# Altium PCB PCB_INTER.PcbDoc
Units mm, origin at the board's own origin, x right, y up, seen from the top; angles counter-clockwise.
Board outline 48 x 54.6 mm, 2 copper layers (Top Layer, Bottom Layer); 33 components, 36 nets, 155 pads, 7 vias.
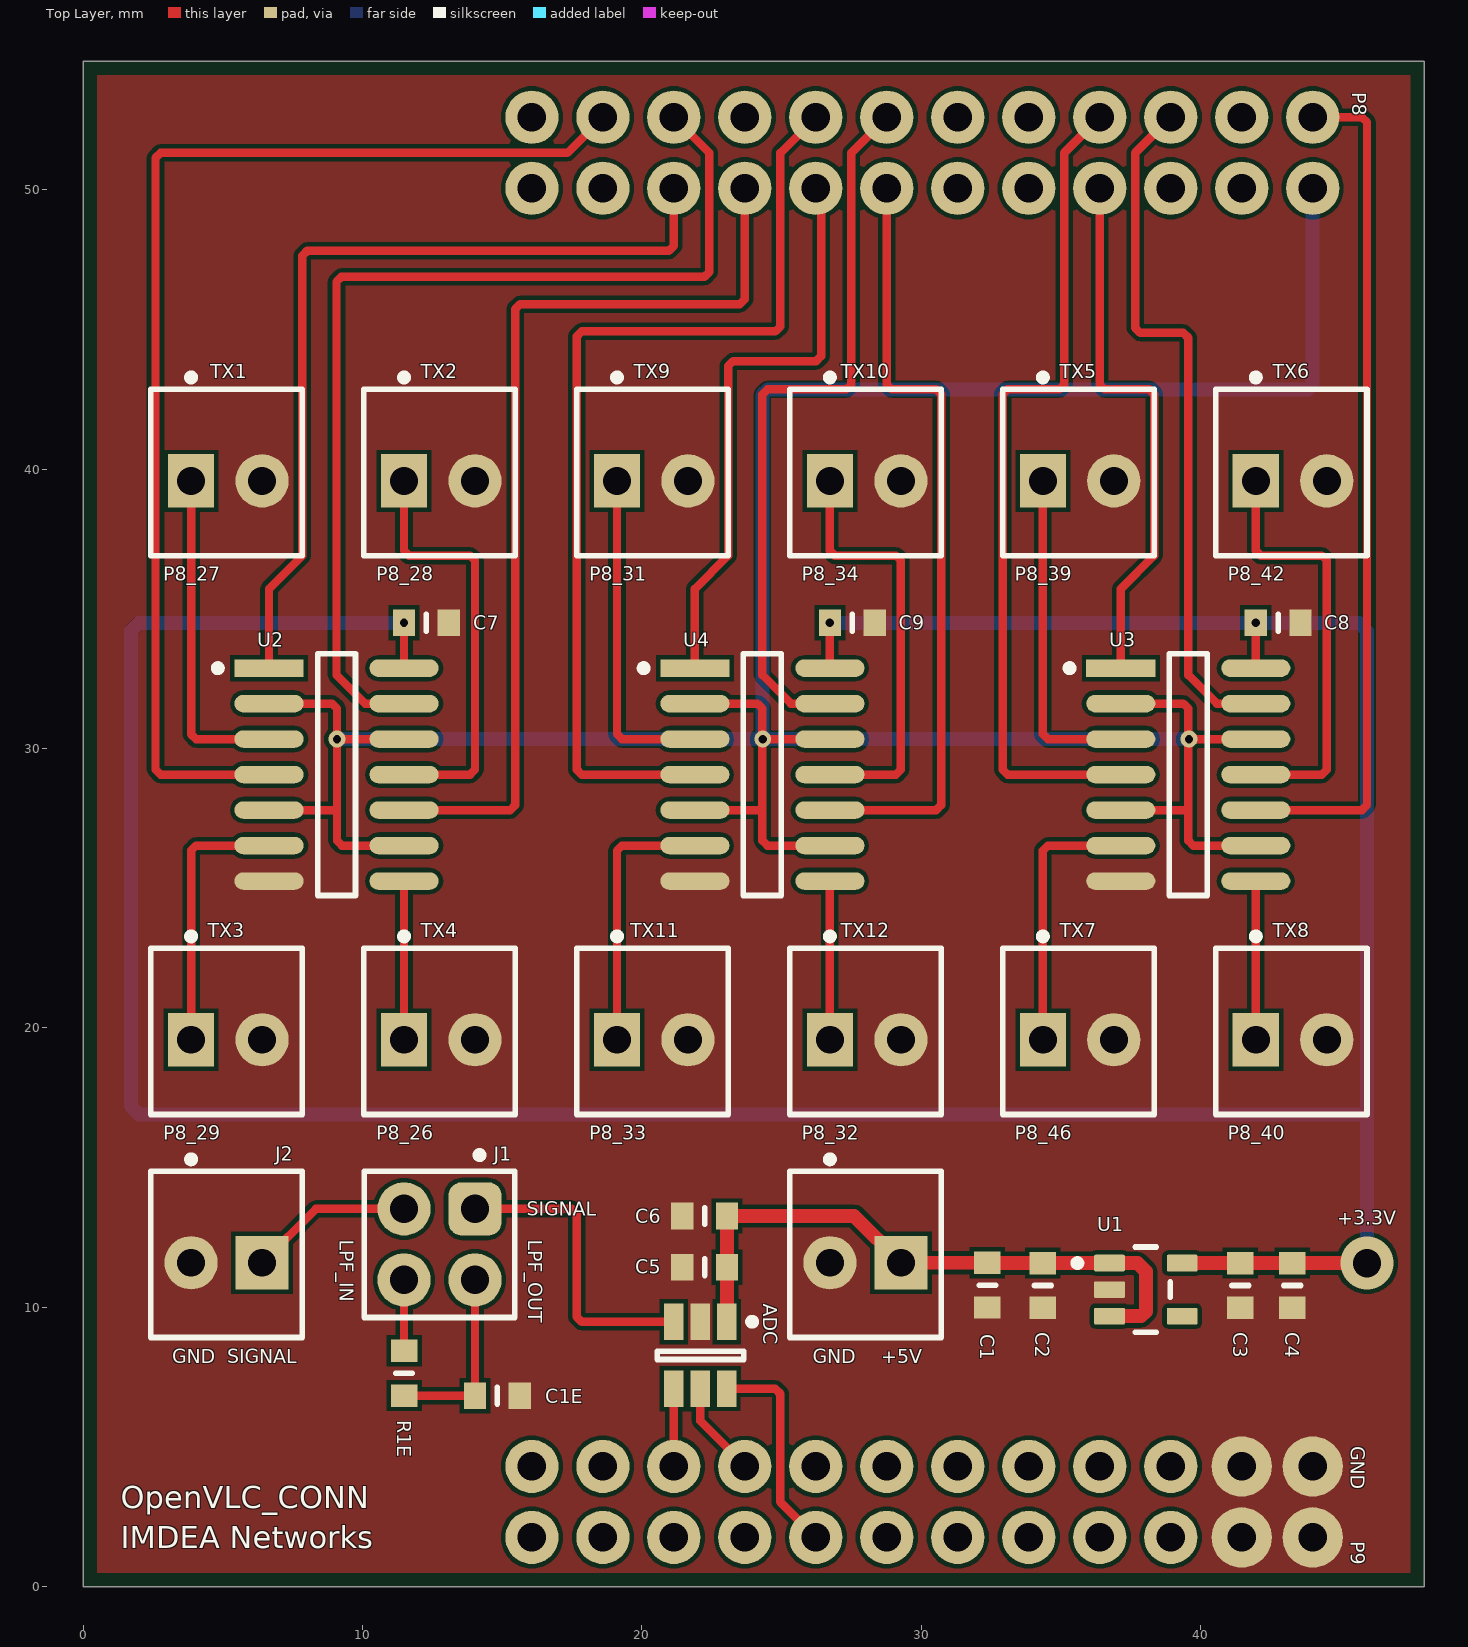
[diagram p0: Top Layer view]
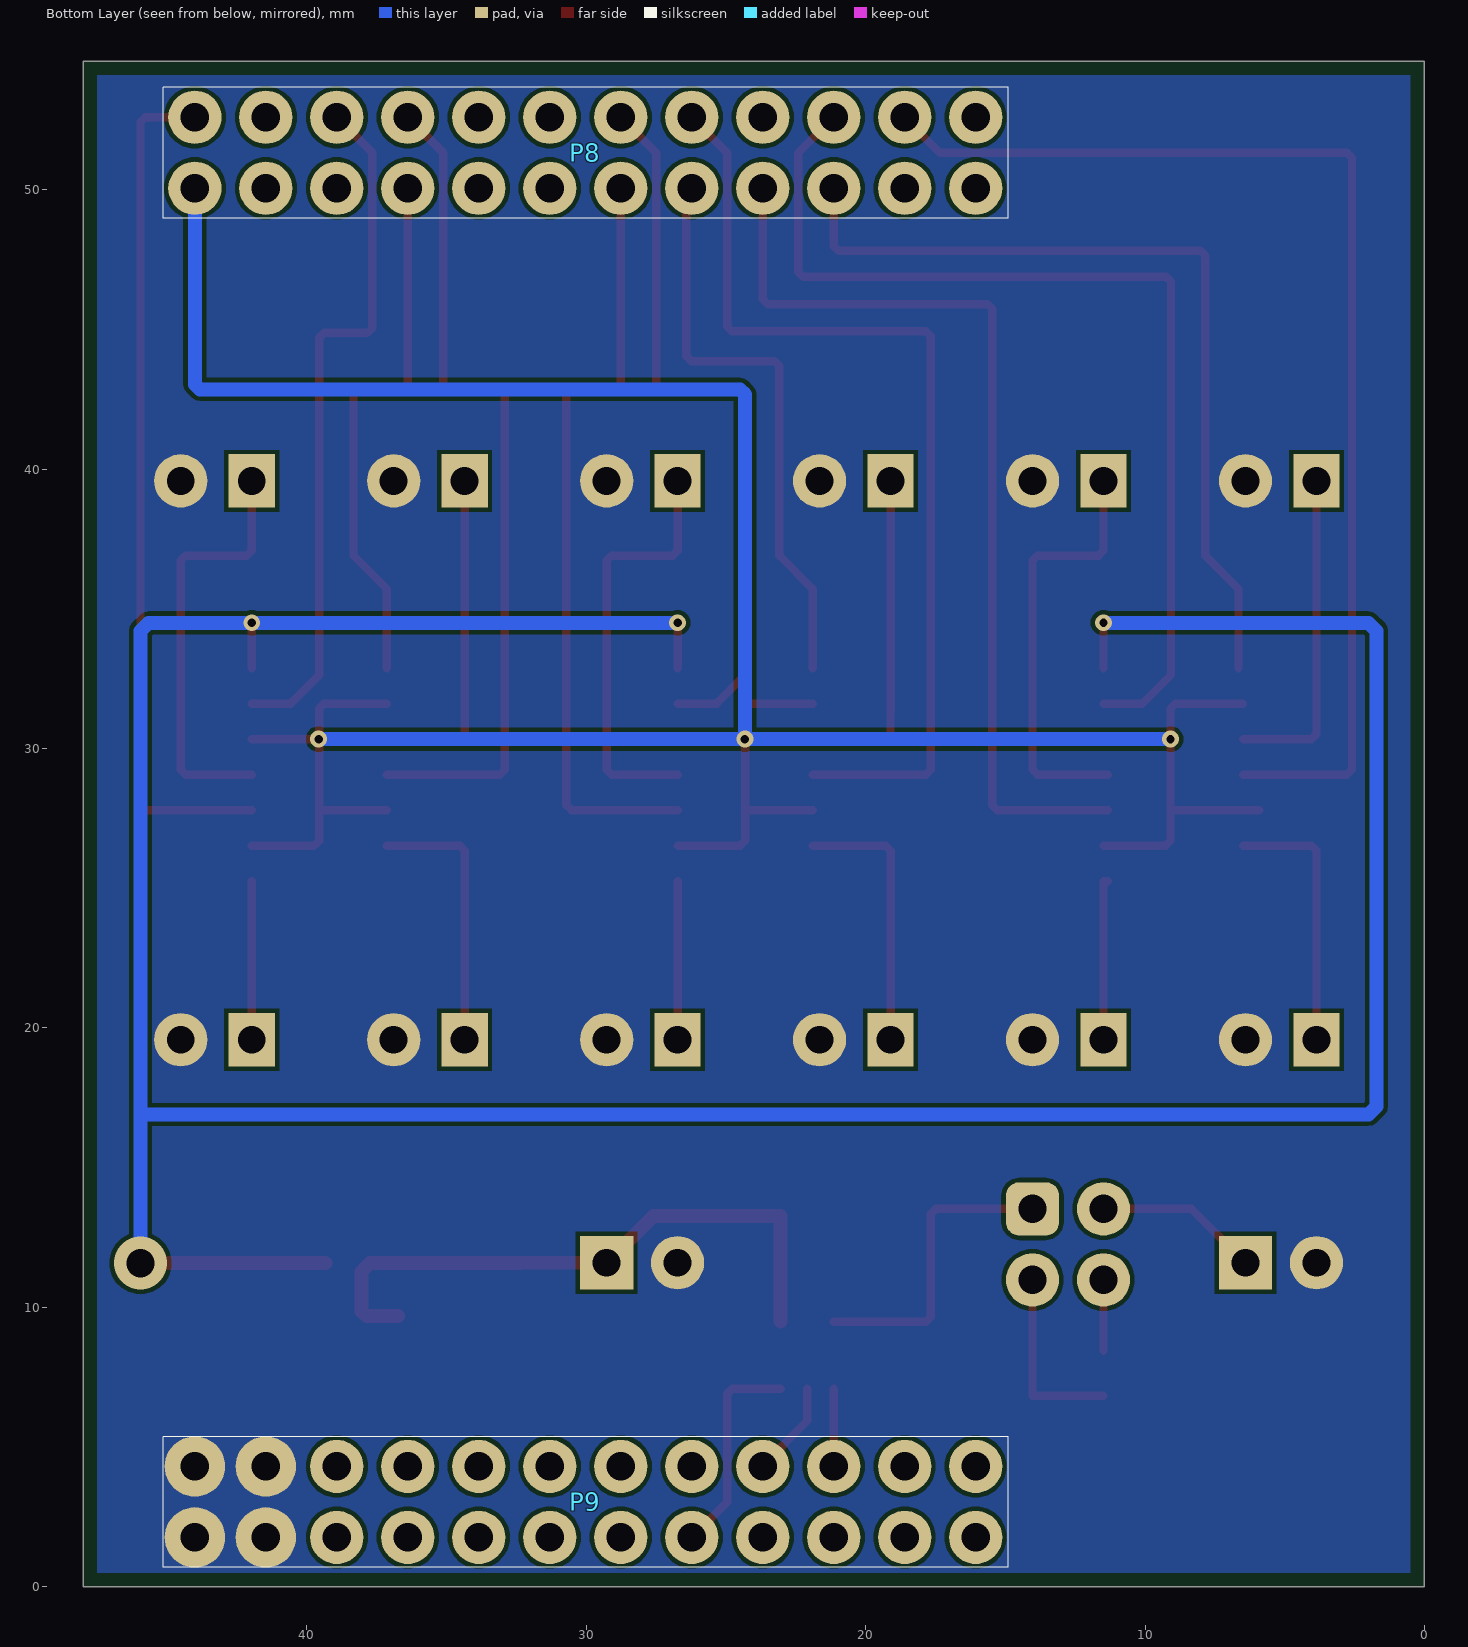
[diagram p1: Bottom Layer view, seen from below]
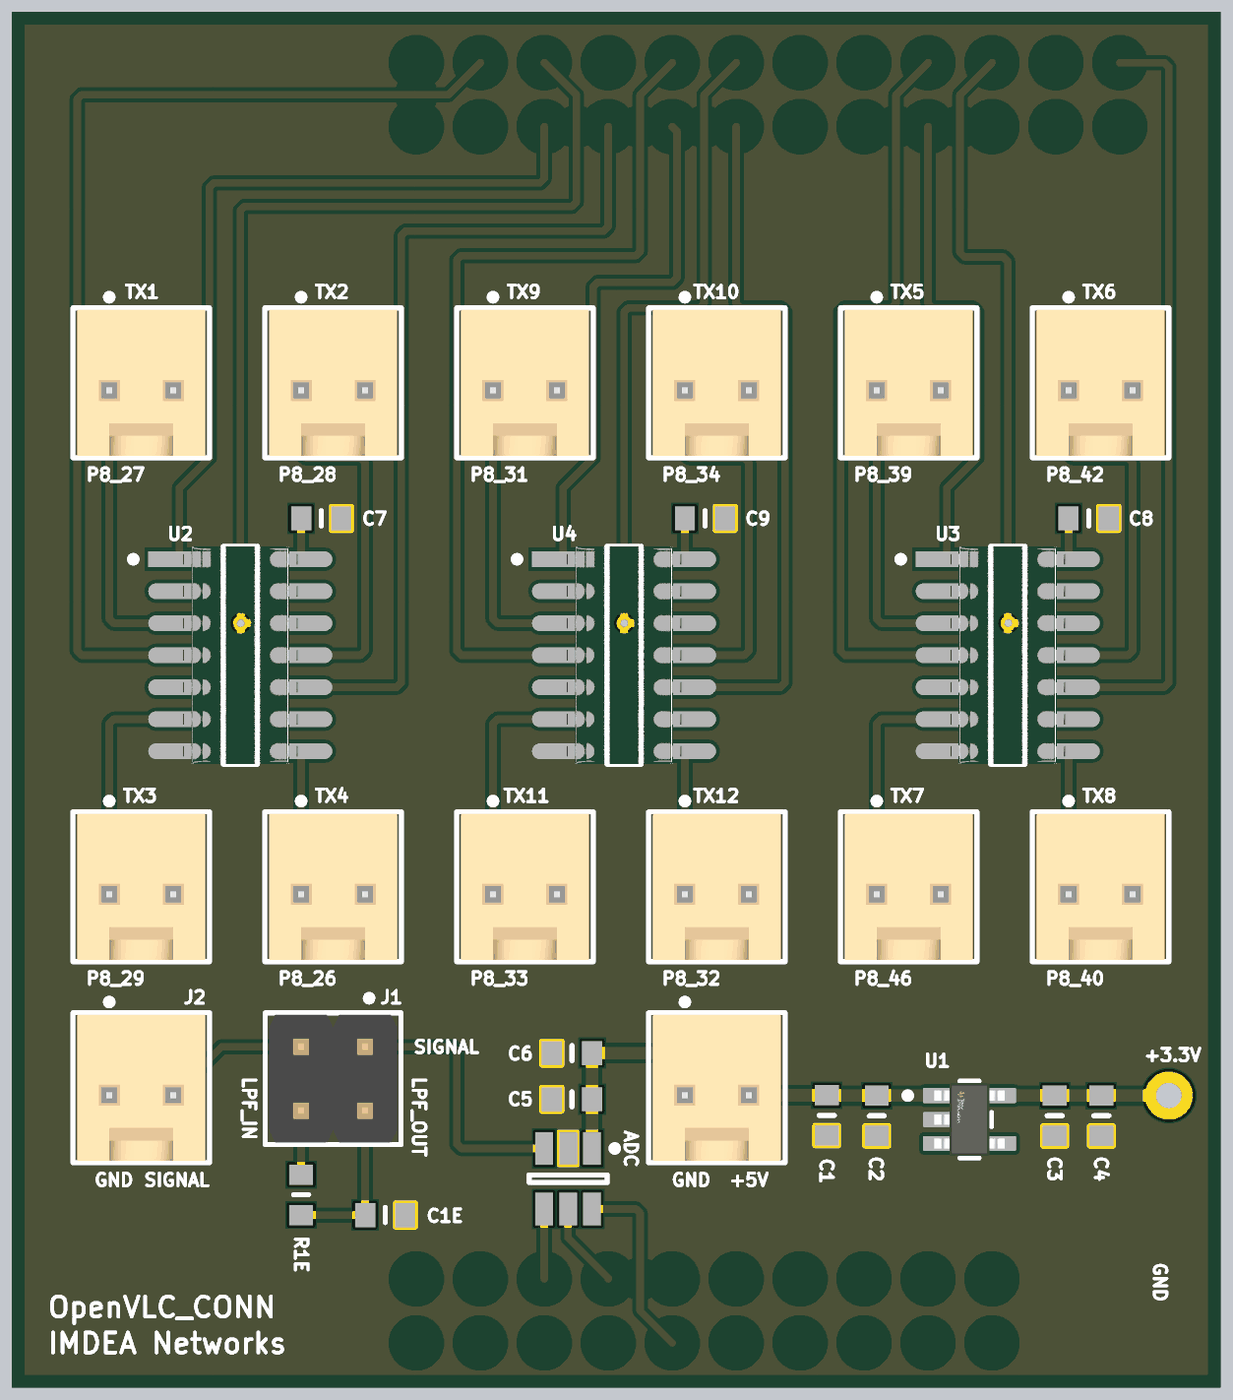
[diagram p2: 3D render of the assembled board from above, using the file's embedded part models]

## Layer stack, top to bottom
Top Solder: solder mask 0.0102, Solder Resist, Dk 3.5
Top Layer: signal copper 0.07
Dielectric1: dielectric 0.32, FR-4, Dk 4.8
Bottom Layer: signal copper 0.07
Bottom Solder: solder mask 0.0102, Solder Resist, Dk 3.5

## Board outline
0,0 48,0 48,54.6 0,54.6

## Design rules (kind name [scope] priority, off if disabled: settings)
Clearance Clearance_1 [(InNet('GND') AND InComponent('DC-DC'))] p1: gap=0.5 ignorepadtopadclearanceinfootprint=FALSE except(0: Arc-Hole Track-Hole SMDPad-Hole THPad-Hole Via-Hole Fill-Hole Poly-Hole Region-Hole Text-Hole)
Clearance [All] p2: gap=0.15 ignorepadtopadclearanceinfootprint=FALSE except(0: Arc-Hole Track-Hole SMDPad-Hole THPad-Hole Via-Hole Fill-Hole Poly-Hole Region-Hole Text-Hole)
DiffPairsRouting [All] p1: maxlimit=0.3 minlimit=0.3 mostfreqgap=0.3 toplayer_minwidth=0.381 toplayer_maxwidth=0.381 toplayer_prefwidth=0.381 bottomlayer_minwidth=0.381 bottomlayer_maxwidth=0.381 bottomlayer_prefwidth=0.381 maxuncoupledlength=12.7
HoleSize [All] p1: absolutevalues=TRUE maxlimit=2.54 minlimit=0.25 maxpercent=80.000 minpercent=20.000
MinimumSolderMaskSliver [All] p1: minsoldermaskwidth=0.15
PlaneClearance [All] p1: clearance=0.5
PlaneConnect [All] p1: planeconnectstyle=Direct reliefexpansion=0.508 reliefentries=4 reliefconductorwidth=0.254 reliefairgap=0.254
PolygonConnect PolygonConnect_1 [IsVia & InNet('GND')] p1: connectstyle=Direct reliefconductorwidth=0.254 reliefentries=4 polygonreliefangle="90 Angle" airgapwidth=0
PolygonConnect [All] p2: connectstyle=Direct reliefconductorwidth=0.254 reliefentries=4 polygonreliefangle="90 Angle" airgapwidth=0.254
RoutingVias [All] p1: holewidth=0.711 width=1.27 viastyle="Through Hole" minholewidth=25 minwidth=0.55 maxholewidth=0.711 maxwidth=1.27
SMDNeckDown [All] p1: percent=80.000
SilkToSilkClearance [All] p1: silktosilkclearance=0.15
SilkToSolderMaskClearance [IsPad] p1: minsilkscreentomaskgap=0.15 clearancetoexposedcopper=TRUE
SolderMaskExpansion [All] p1: expansion=0.102 istentingtop=FALSE
SupplyNets "Schematic Supply Nets_5" [InNet('+5V')] p1: voltage=0.000
SupplyNets "Schematic Supply Nets_2" [InNet('+3.3V')] p2: voltage=0.000
SupplyNets "Schematic Supply Nets" [InNet('GND')] p3: voltage=0.000
Width [All] p1: maxlimit=0.5 minlimit=0.15 preferedwidth=0.3 minimp=50.000000 maximp=50.000000 favimp=50.000000
23 further rules are at their usual default settings.

## Components (designator, comment, footprint, x,y, rotation, side; value= is the part's Value field where it differs from the comment)
+5V "61900211121" 61900211121#1 27.995,11.9 r180 top
ADC "ADS7886SBDBVR" TI-DBV6_M 22.09,8.288 r270 top
C1 "GRM188R6YA106MA73D" RESC1608X55N 32.362,10.8 r270 top value=10uF
C1E "Cap" RESC1608X55N 14.826,6.846 r0 top value=620pF
C2 "GCM188R71H104KA57J" RESC1608X55N 34.346,10.787 r270 top value=100nF
C3 "GRM188R6YA106MA73D" RESC1608X55N 41.414,10.787 r90 top value=10uF
C4 "GCM188R71H104KA57J" RESC1608X55N 43.266,10.787 r270 top value=2.2uF
C5 "Cap" RESC1608X55N 22.24,11.442 r180 top value=1000pF
C6 "Cap" RESC1608X55N 22.24,13.273 r180 top value=100nF
C7 "GCM188R71H104KA57J" RESC1608X55N 12.286,34.5 r0 top value=100nF
C8 "GCM188R71H104KA57J" RESC1608X55N 42.765,34.5 r0 top value=100nF
C9 "GCM188R71H104KA57J" RESC1608X55N 27.526,34.5 r0 top value=100nF
J1 "61300421121" 61300421121 12.756,12.256 r180 top
J2 "61900211121" 61900211121#1 5.135,11.9 r180 top
P8 "61302421121" BBB_CAPE_NO_HEADER_R_24#1 71.94,50.049 r0 bottom
P9 "61302421121" BBB_CAPE_NO_HEADER_R_24#2 71.94,1.771 r0 bottom
R1E "Res1" RESC1608X55N 11.486,7.646 r90 top value=130
TX1 "61900211121" 61900211121#2 5.135,39.879 r180 top
TX2 "61900211121" 61900211121#2 12.755,39.879 r180 top
TX3 "61900211121" 61900211121#2 5.135,19.879 r180 top
TX4 "61900211121" 61900211121#2 12.755,19.879 r180 top
TX5 "61900211121" 61900211121#2 35.615,39.879 r180 top
TX6 "61900211121" 61900211121#2 43.235,39.879 r180 top
TX7 "61900211121" 61900211121#2 35.615,19.879 r180 top
TX8 "61900211121" 61900211121#2 43.235,19.879 r180 top
TX9 "61900211121" 61900211121#2 20.375,39.879 r180 top
TX10 "61900211121" 61900211121#2 27.995,39.879 r180 top
TX11 "61900211121" 61900211121#2 20.375,19.879 r180 top
TX12 "61900211121" 61900211121#2 27.995,19.879 r180 top
U1 "TPS7A2433DBVR" FP-DBV0005A-MFG 38.029,10.637 r0 top
U2 "SN74HCS126DR" FP-D0014A-IPC_A 9.07,29.067 r0 top
U3 "SN74HCS126DR" FP-D0014A-IPC_A 39.549,29.067 r0 top
U4 "SN74HCS126DR" FP-D0014A-IPC_A 24.31,29.067 r0 top

## Footprints (in the part's own frame and the unit in brackets; to place one, negate y for a bottom-side part, rotate by r counter-clockwise, add the part's x,y. Pads: shape width x height; smd on the part's side, far side on the other; paste and mask are expansions set on the pad)
61300421121 [mil] "Pin Header, pitch 2.54 mm, THT, Vertical, dual row, 4p"
  rrect50% 75x75 hole 40: 1(-50,-50)
  round 75 hole 40: 2(-50,50) 3(50,-50) 4(50,50)
  silkscreen extent -106,-131 106,103, body extent -100,-100 100,100, height 338
61900211121#1 [mm] "2.54mm Male Locking Header, 2p"
  round 1.905 hole 1: 1(1.27,0.3)
  rect 1.905x1.905 hole 1: 2(-1.27,0.3)
  silkscreen extent -2.71,-3.52 2.71,2.98, body extent -2.54,-2.9 2.54,2.9, height 11.53
61900211121#2 [mm] "2.54mm Male Locking Header, 2p"
  rect 1.651x1.905 hole 1: 1(1.27,0.3)
  round 1.905 hole 1: 2(-1.27,0.3)
  silkscreen extent -2.71,-3.52 2.71,2.98, body extent -2.54,-2.9 2.54,2.9, height 11.53
BBB_CAPE_NO_HEADER_R_24#1 [mil] "46-pin male header for BeagleBone Black P8,P9"
  round 75 hole 40: 23(-1100,0) 24(-1100,-100) 25(-1200,0) 26(-1200,-100) 27(-1300,0) 28(-1300,-100) 29(-1400,0) 30(-1400,-100) 31(-1500,0) 32(-1500,-100) 33(-1600,0) 34(-1600,-100) 35(-1700,0) 36(-1700,-100) 37(-1800,0) 38(-1800,-100) 39(-1900,0) 40(-1900,-100) 41(-2000,0) 42(-2000,-100) 43(-2100,0) 44(-2100,-100) 45(-2200,0) 46(-2200,-100)
  silkscreen extent -2246,-142 -1056,42
BBB_CAPE_NO_HEADER_R_24#2 [mil] "46-pin male header for BeagleBone Black P8,P9"
  round 85 hole 40: 23(-1100,0) 24(-1100,-100) 25(-1200,0) 26(-1200,-100)
  round 75 hole 40: 27(-1300,0) 28(-1300,-100) 29(-1400,0) 30(-1400,-100) 31(-1500,0) 32(-1500,-100) 33(-1600,0) 34(-1600,-100) 35(-1700,0) 36(-1700,-100) 37(-1800,0) 38(-1800,-100) 39(-1900,0) 40(-1900,-100) 41(-2000,0) 42(-2000,-100) 43(-2100,0) 44(-2100,-100) 45(-2200,0) 46(-2200,-100)
  silkscreen extent -2246,-142 -1056,42
FP-D0014A-IPC_A [mm]
  rect 2.474x0.622 smd paste+0 mask+0: 1(-2.416,3.81)
  rrect100% 2.474x0.622 smd paste+0 mask+0: 2(-2.416,2.54) 3(-2.416,1.27) 4(-2.416,0) 5(-2.416,-1.27) 6(-2.416,-2.54) 7(-2.416,-3.81) 8(2.416,-3.81) 9(2.416,-2.54) 10(2.416,-1.27) 11(2.416,0) 12(2.416,1.27) 13(2.416,2.54) 14(2.416,3.81)
  silkscreen extent -4.37,-4.33 0.68,4.33, body extent -4.15,-4.82 4.15,4.82, height 0.25
FP-DBV0005A-MFG [mm]
  rrect17% 1.1x0.6 smd paste+0 mask+0: 1(-1.3,0.95) 2(-1.3,0) 3(-1.3,-0.95) 4(1.3,-0.95) 5(1.3,0.95)
  silkscreen extent -2.57,-1.53 0.87,1.53, body extent -1.95,-1.78 1.95,1.78, height 0.25
RESC1608X55N [mm]
  rect 0.8x0.95 smd: 1(-0.8,0) 2(0.8,0)
  silkscreen extent 0,-0.3 0,0.3
TI-DBV6_M [mm] "SOT23, 6-Leads, Body 2.9x1.6mm, Pitch 0.95mm, IPC Low Density"
  rect 1.3x0.7 smd: 1(-1.2,0.95) 2(-1.2,0) 3(-1.2,-0.95) 4(1.2,-0.95) 5(1.2,0) 6(1.2,0.95)
  silkscreen extent -1.32,-1.55 0.15,1.98, body extent -0.87,-1.52 0.87,1.53, height 1.45

## Part data
+5V J2 TX1 TX2 TX3 TX4 TX5 TX6 TX7 TX8 TX9 TX10 TX11 TX12: library part CMP-1502-00584-3, Color=Beige, Contact Resistance=20mΩ, Current Rating=3A, Flammability Rating="UL94 V-0", Insulation Resistance=1GΩ, Max Operating Temperature=105°C, Min Operating Temperature=-40°C, Operating Supply Voltage=250V, Connector Type="Male Pin", Contact Gender=Male, Contact Material=Copper, Contact Mating Length=7.493mm, Contact Plating=Tin, Fastening Type=Friction, Gender=Male, Height=11.75mm, Housing Material=Nylon, Lead Pitch=2.54mm, Length=5.08mm, Mount="Through Hole", NexarPartId=18818218, Number of Contacts=2, Number of Pins=2, Number of Positions=2, Number of Rows=1, Orientation=Vertical, Packaging=Bulk, Pitch=2.54mm, REACH SVHC=Unknown, RoHS=Compliant, Termination="Through Hole", Voltage Rating=250V, Width=5.12mm
ADC: library part CMP-0003-00246-2, "2.35 to 5.25 V, 12-Bit, 1 MSPS, Serial ADC, -40 to 125 degC, 6-pin SOT23 (DBV6), Green (RoHS & no Sb/Br)", Analog Voltage AV/DD(Max)(V)=5.25, Analog Voltage AV/DD(Min)(V)=2.35, Manufacturer="Texas Instruments", # Input Channels=1, Architecture=SAR, Code_JEDEC=MO-178, ComponentLink1Description="Manufacturer URL", ComponentLink1URL=http://www.ti.com/, ComponentLink2Description=Datasheet, ComponentLink2URL=http://www.ti.com/general/docs/lit/getliterature.tsp?genericPartNumber=ADS7886&fileType=pdf, ComponentLink3Description="Package Specification", ComponentLink3URL=http://www.ti.com/litv/pdf/mpds026h, DatasheetVersion=SLAS492A, Digital Supply(Max)(V)=5.25, Digital Supply(Min)(V)=2.35, Eco-Plan="Green (RoHS & no Sb/Br)", INL(Max)(+/-LSB)=1.25, Interface="Serial SPI", Mounting Technology="Surface Mount", PackageDescription="6-Pin Plastic Small Outline, Body 1.6 x 2.9 mm, Pitch 0.95 mm", PackageReference=DBV6, PackageVersion="4073253-5/K, 03/2006", PartNumber=ADS7886SBDBVR, Resolution(Bits)=12, Sample Rate (max)(SPS)=1M, SFDR(dB)=85.5, SINAD(dB)=71.25, SNR(dB)=71.25, SubFamily="Precision ADC (<=10MSPS)"
C1 C2 C3 C4 C7 C8 C9: library part Cap, "Capacitor", LatestRevisionDate=17-Jul-2002, LatestRevisionNote="Re-released for DXP Platform.", PackageDescription="Radial Cap, Thru-Hole; 2 Leads; 0.3 in Pin Spacing", PackageReference=RAD-0.3, Published=8-Jun-2000, Publisher="Altium Limited"
C1E C5 C6: "Capacitor", LatestRevisionDate=17-Jul-2002, LatestRevisionNote="Re-released for DXP Platform.", PackageDescription="Radial Cap, Thru-Hole; 2 Leads; 0.3 in Pin Spacing", PackageReference=RAD-0.3, Published=8-Jun-2000, Publisher="Altium Limited"
J1: library part CMP-1502-01066-4, Color=Black, Contact Resistance=20mΩ, Current Rating=3A, Max Operating Temperature=105°C, Min Operating Temperature=-40°C, Operating Supply Voltage=250V, Connector Type="Male Pin", Contact Material=Copper, Contact Mating Length=5.9944mm, Contact Plating=Gold, Gender=Male, Height=8.89mm, Lead Free="Lead Free", Lead Pitch=2.54mm, Mount="Through Hole", NexarPartId=32855524, Number of Contacts=4, Number of Pins=4, Number of Positions=4, Number of Rows=2, Orientation=Vertical, Packaging=Bulk, Pitch=2.54mm, REACH SVHC=Unknown, RoHS=Compliant, Row Spacing=2.54mm, Termination=Solder, Voltage Rating=250V
P8: library part BBB_P8_reduced
P9: library part BBB_P9_reduced
R1E: "Resistor", LatestRevisionDate=17-Jul-2002, LatestRevisionNote="Re-released for DXP Platform.", PackageDescription="Axial Device, Thru-Hole; 2 Leads; 0.3 in Pin Spacing", PackageReference=AXIAL-0.3, Published=8-Jun-2000, Publisher="Altium Limited"
U1: library part CMP-00370-106221451-1, "TPS7A2433DBVR 200-mA, 18-V, ultra-low-IQ, low-dropout (LDO) voltage regulator with enable ; 5-SOT-23 -40 to 125", Case/Package=SOT-23, Manufacturer Lifecycle Status=ACTIVE, Output Voltage=3.3V, Height=1.45mm, Length=2.9mm, Lifecycle Status=Production, NexarPartId=106221451, Number of Channels=1, Number of Pins=5, Thickness=1.2mm, Width=1.6mm
U2 U3 U4: library part CMP-04900-000037-1, "Schmitt-trigger inputs quadruple bus buffer gates with 3-state outputs 14-SOIC -40 to 125"

## Via types
v1: diameter 0.6, hole 0.3, Top Layer to Bottom Layer, 6 vias
v2: diameter 1.905, hole 1.016, Top Layer to Bottom Layer, 1 vias

## Nets (pads, with @x,y where several pads share a name; then routed paths per layer and width w, separated by ;. In a path a pad name is that pad's centre, name@x,y a point inside that pad or via, vN(x,y) a via of type N, cw(c..) or ccw(c..) an arc to the next point about the centre after c; other vN are vias at no path point)
+3.3V: C3.2 C4.1 C7.1 C8.1 C9.1 U1.5 U2.14 U3.14 U4.14 | length 125
  Top Layer w0.3: U2.14 v1(11.486,34.5) ; U4.14 v1(26.726,34.5) ; U3.14 v1(41.965,34.5)
  Top Layer w0.5: U1.5 C3.2 C4.1 v2(45.945,11.587) v2@46.2,11.587
  Bottom Layer w0.5: v1(11.486,34.5) 2.007,34.5 1.714,34.207 1.714,17.196 2.007,16.904 45.945,16.904 ; v1(26.726,34.5) v1(41.965,34.5) 45.652,34.5 45.945,34.207 45.945,16.904 ; v2(45.945,11.587) 45.945,16.904
+5V: +5V.2 ADC.1 C1.1 C2.1 C5.1 C6.1 U1.1 U1.3 | length 22.4
  Top Layer w0.5: ADC.1 C6.1 27.592,13.273 +5V.2 C1.1 ; C1.1@32.362,11.587 C2.1 U1.1 37.736,11.587 38.029,11.294 38.029,9.862 37.853,9.687 U1.3
ADC_IN: ADC.3 J1.1 | length 10.9
  Top Layer w0.3: J1.1 17.489,13.526 17.665,13.351 17.665,9.664 17.841,9.488 ADC.3
CS_PD: ADC.6 P9.37 | length 7.6
  Top Layer w0.3: ADC.6 24.773,7.088 24.948,6.913 24.948,3.043 P9.37
GND: +5V.1 ADC.2 C1.2 C1E.2 C2.2 C3.1 C4.2 C5.2 C6.2 C7.2 C8.2 C9.2 J2.1 P9.23 P9.24 P9.25 P9.26 TX1.2 TX2.2 TX3.2 TX4.2 TX5.2 TX6.2 TX7.2 TX8.2 TX9.2 TX10.2 TX11.2 TX12.2 U1.2 U2.7 U3.7 U4.7
LPF_IN: J1.4 R1E.2 | length 2.5
  Top Layer w0.3: R1E.2 J1.4
LPF_OUT: C1E.1 J1.2 R1E.1 | length 6.7
  Top Layer w0.3: R1E.1 C1E.1 J1.2
MISO_PD: ADC.5 P9.40 | length 3.4
  Top Layer w0.3: ADC.5 22.09,5.938 23.68,4.348 P9.40
MOSI_PD: ADC.4 P9.42 | length 2.8
  Top Layer w0.3: P9.42 ADC.4
NetJ1_3: J1.3 J2.2 | length 5.9
  Top Layer w0.3: J2.2 8.331,13.526 J1.3
NetTX1_1: TX1.1 U2.3 | length 11.8
  Top Layer w0.3: TX1.1 3.865,30.512 4.041,30.336 U2.3@6.495,30.336
NetTX2_1: TX2.1 U2.11 | length 15.4
  Top Layer w0.3: U2.11@11.327,29.067 13.85,29.067 14.026,29.243 ; TX2.1 11.485,37.079 11.661,36.904 13.849,36.904 14.025,36.728 14.025,29.243
NetTX3_1: TX3.1 U2.6 | length 9.5
  Top Layer w0.3: TX3.1 3.865,26.356 ; 3.866,26.351 4.041,26.527 U2.6@6.495,26.527
NetTX4_1: TX4.1 U2.8 | length 5.9
  Top Layer w0.3: U2.8@11.327,25.257 11.337,25.257 U2.8@11.485,25.109 ; TX4.1 U2.8@11.485,25.109 ; U2.8 U2.8@11.485,25.109
NetTX5_1: TX5.1 U3.3 | length 11.9
  Top Layer w0.3: 34.345,31.324 TX5.1 ; 34.346,31.324 34.346,30.513 34.521,30.337 U3.3
NetTX6_1: TX6.1 U3.11 | length 15.3
  Top Layer w0.3: U3.11 44.33,29.067 44.506,29.243 ; TX6.1 41.965,37.079 42.141,36.904 44.329,36.904 44.505,36.728 44.505,29.243
NetTX7_1: TX7.1 U3.6 | length 9.6
  Top Layer w0.3: TX7.1 34.345,26.351 ; 34.346,26.351 34.521,26.527 U3.6
NetTX8_1: TX8.1 U3.8 | length 5.7
  Top Layer w0.3: TX8.1 U3.8@41.965,25.256
NetTX9_1: TX9.1 U4.3 | length 11.9
  Top Layer w0.3: 19.105,31.324 TX9.1 ; 19.106,31.324 19.106,30.513 19.281,30.337 U4.3
NetTX10_1: TX10.1 U4.11 | length 15.3
  Top Layer w0.3: TX10.1 26.725,37.079 26.901,36.904 29.089,36.904 29.265,36.728 29.265,29.243 ; U4.11 29.09,29.067 29.266,29.243
NetTX11_1: TX11.1 U4.6 | length 9.6
  Top Layer w0.3: TX11.1 19.105,26.351 ; 19.106,26.351 19.281,26.527 U4.6
NetTX12_1: TX12.1 U4.8 | length 5.7
  Top Layer w0.3: TX12.1 U4.8
P8_26: P8.44 U2.4 | length 42.5
  Top Layer w0.3: U2.4@6.495,29.067 2.77,29.067 2.593,29.244 2.593,51.142 2.769,51.318 17.329,51.318 P8.44
P8_27: P8.41 U2.1 | length 30.8
  Top Layer w0.3: U2.1 6.653,34.718 6.653,35.711 7.845,36.904 7.845,47.637 8.021,47.812 20.964,47.812 21.14,47.988 P8.41
P8_28: P8.42 U2.13 | length 36.5
  Top Layer w0.3: U2.13 10.09,31.607 9.069,32.628 9.069,41.63 9.069,46.707 9.244,46.882 22.236,46.882 22.412,47.058 22.412,51.317 P8.42
P8_29: P8.39 U2.10 | length 34.3
  Top Layer w0.3: U2.10@11.327,27.797 15.29,27.797 15.466,27.973 ; 15.465,27.973 15.465,45.729 15.641,45.905 23.504,45.905 23.68,46.08 P8.39
P8_30: P8.40
P8_31: P8.37 U4.1 | length 20.9
  Top Layer w0.3: U4.1 21.893,34.9 ; 21.893,34.901 21.893,35.711 23.085,36.904 23.085,43.688 23.261,43.864 26.237,43.864 26.413,44.04 26.413,49.856 P8.37
P8_32: P8.38 U4.4 | length 35.3
  Top Layer w0.3: U4.4 17.841,29.067 17.665,29.243 17.665,44.751 17.841,44.927 24.774,44.927 24.95,45.103 24.95,51.318 P8.38
P8_33: P8.35 U4.10 | length 27.9
  Top Layer w0.3: U4.10 30.53,27.797 30.706,27.973 ; P8.35 28.76,43.029 28.936,42.854 30.529,42.854 30.705,42.678 30.705,27.973
P8_34: P8.36 U4.13 | length 26.3
  Top Layer w0.3: U4.13 25.33,31.607 24.309,32.628 24.309,42.678 24.484,42.854 27.316,42.854 27.491,43.029 27.491,51.32 P8.36
P8_39: P8.29 U3.1 | length 19.4
  Top Layer w0.3: P8.29 36.38,43.029 36.556,42.854 38.149,42.854 38.325,42.678 38.325,36.904 37.132,35.711 ; U3.1 37.133,35.71
P8_40: P8.30 U3.4 | length 30.2
  Top Layer w0.3: P8.30 35.111,51.319 35.111,43.029 34.935,42.854 33.081,42.854 32.905,42.678 32.905,29.243 33.081,29.067 U3.4
P8_42: P8.28 U3.13 | length 25
  Top Layer w0.3: P8.28 37.651,51.319 37.651,45.052 37.827,44.877 39.372,44.877 39.548,44.701 39.548,33.439 ; 39.549,33.438 39.549,32.627 40.569,31.607 U3.13
P8_45: P8.23 U2.2 U2.5 U2.9 U2.12 U3.2 U3.5 U3.9 U3.12 U4.2 U4.5 U4.9 U4.12 | length 113.9
  Top Layer w0.3: U2.5@5.911,27.797 8.911,27.797 ; U2.2@6.495,31.607 8.911,31.607 9.087,31.431 v1(9.087,30.337) ; U2.12@11.327,30.337 v1(9.087,30.337) ; U2.9 9.262,26.527 9.087,26.703 v1(9.087,30.337) ; U4.5 24.292,27.797 24.31,27.779 ; U4.2 24.134,31.607 24.31,31.431 v1@24.31,30.329 ; U4.9 24.485,26.527 24.31,26.703 v1@24.31,30.329 ; U4.12 v1(24.318,30.337) v1@24.31,30.329 ; U3.5 39.541,27.797 39.549,27.79 ; U3.2 39.373,31.607 39.549,31.431 v1@39.549,30.314 ; U3.9 39.724,26.527 39.549,26.703 39.549,27.79 ; U3.12 v1(39.572,30.337) v1@39.549,30.314 ; 39.549,27.79 v1@39.549,30.314
  Bottom Layer w0.5: v1(9.087,30.337) v1(24.318,30.337) v1(39.572,30.337) ; v1(24.318,30.337) 24.317,42.678 24.493,42.854 43.824,42.854 44,43.029 P8.23
P8_46: P8.24 U3.10 | length 30.5
  Top Layer w0.3: U3.10 45.77,27.797 45.946,27.973 ; P8.24 45.769,52.589 45.945,52.413 45.945,27.973
pads on no net: P8.25 P8.26 P8.27 P8.31 P8.32 P8.33 P8.34 P8.43 P8.45 P8.46 P9.27 P9.28 P9.29 P9.30 P9.31 P9.32 P9.33 P9.34 P9.35 P9.36 P9.38 P9.39 P9.41 P9.43 P9.44 P9.45 P9.46 U1.4

## Polygon pours and split planes (outlines as drawn)
GND on Top Layer "GND_L01_P018" (solid, pour order 18): 0.5,0.5 0.5,54.1 47.5,54.1 47.5,0.5
GND on Bottom Layer "GND_L02_P017" (solid, pour order 17): 0.5,0.5 0.5,54.1 47.5,54.1 47.5,0.5

## Silkscreen, mask and mechanical layers (free items; w line width, h text height)
Top Overlay:
  text "P8_27" at 2.865,36 h0.5
  text "P8_28" at 10.485,36 h0.5
  text "P8_31" at 18.105,36 h0.5
  text "P8_34" at 25.725,36 h0.5
  text "P8_39" at 33.345,36 h0.5
  text "P8_42" at 40.965,36 h0.5
  text "P8_29" at 2.865,16 h0.5
  text "P8_26" at 10.485,16 h0.5
  text "P8_33" at 18.105,16 h0.5
  text "P8_32" at 25.725,16 h0.5
  text "P8_46" at 33.345,16 h0.5
  text "P8_40" at 40.965,16 h0.5
  text "SIGNAL" at 15.87,13.283 h0.5
  text "+3.3V" at 44.884,12.958 h0.5
  text "LPF_IN" at 9.181,12.418 h0.5 r270
  text "LPF_OUT" at 15.928,12.418 h0.5 r270
  text "GND" at 3.191,8 h0.5
  text "SIGNAL" at 5.163,8 h0.5
  text "GND" at 26.115,8 h0.5
  text "GND" at 45.357,5.041 h0.5 r270
  text "OpenVLC_CONN" at 1.344,2.81 h0.8
  text "IMDEA Networks" at 1.344,1.378 h0.8
Mechanical 1:
  the board outline again, w0.254